# Altium PCB PCB.PcbDoc
Units mil, origin at the board's own origin, x right, y up, seen from the top; angles counter-clockwise.
Board outline 1965 x 1965 mil, 2 copper layers (Top Layer, Bottom Layer); 8 components, 3 nets, 22 pads, 454 vias.
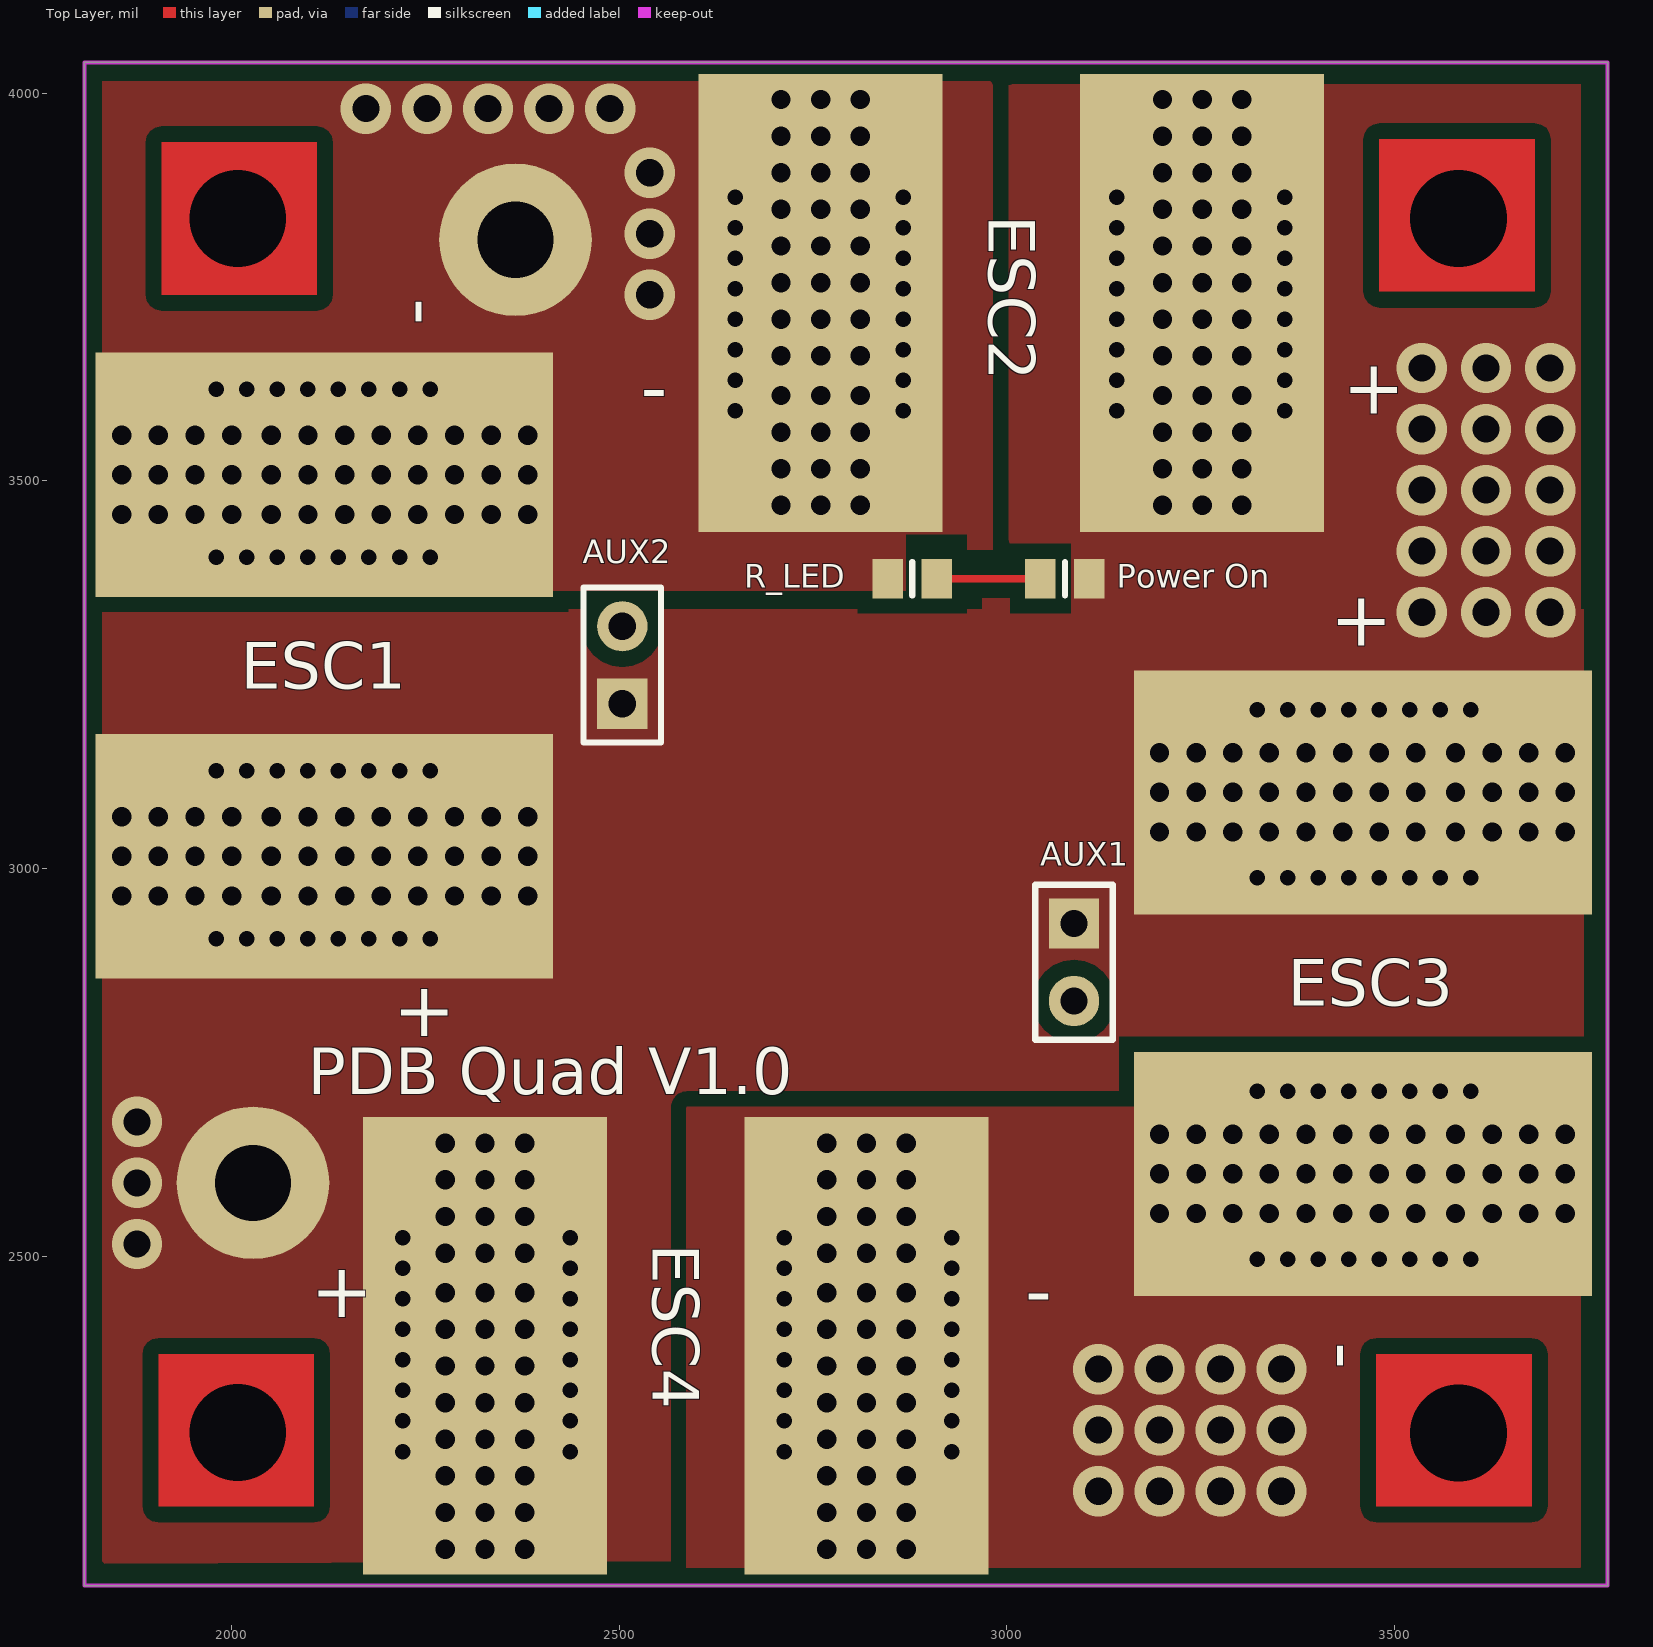
[diagram p0: Top Layer view]
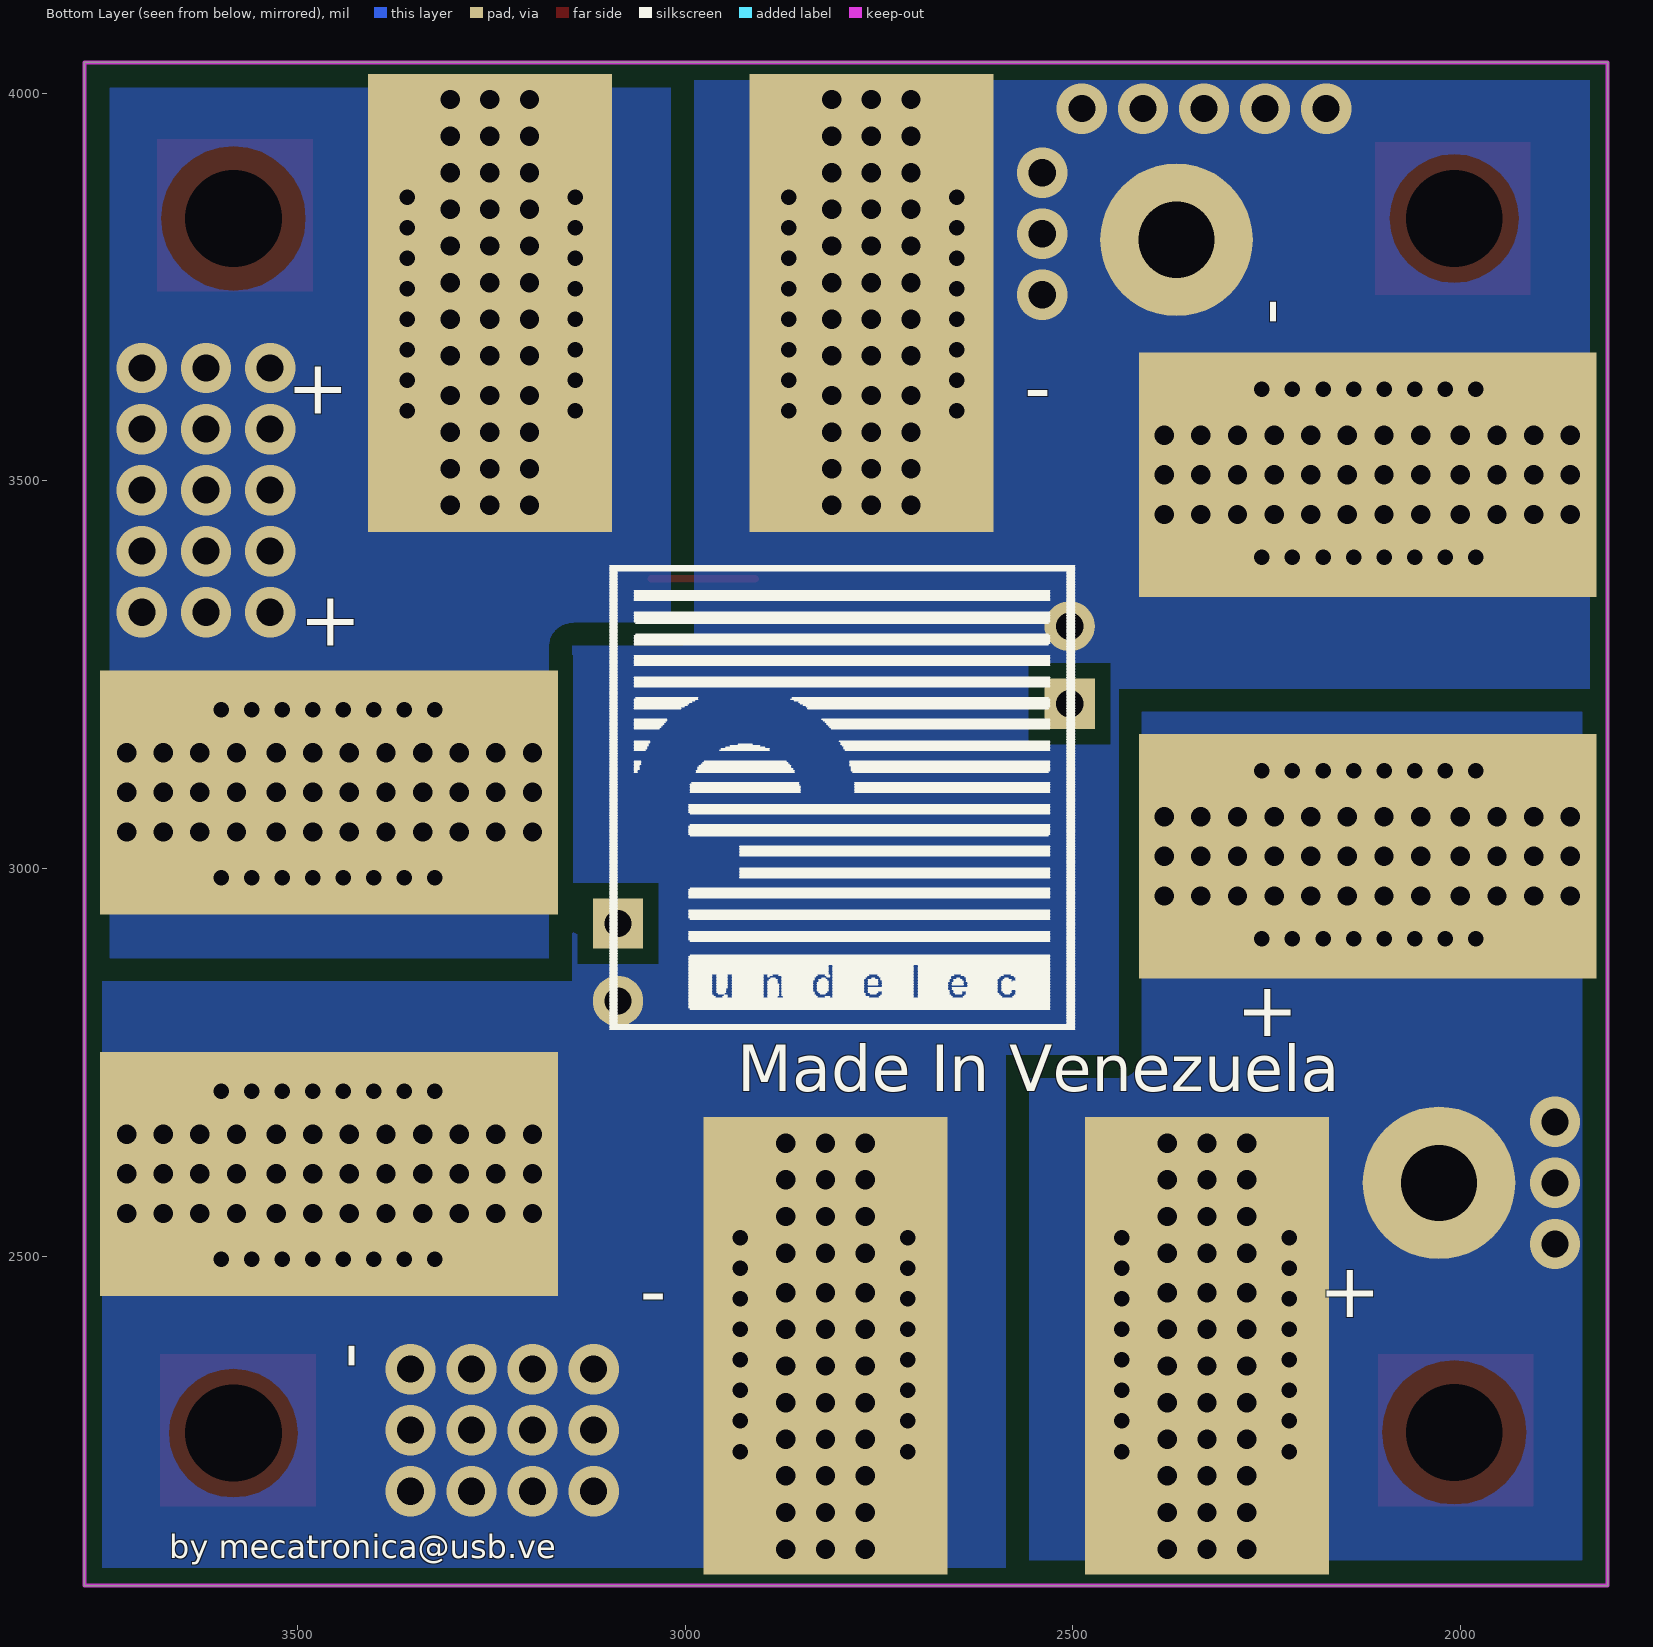
[diagram p1: Bottom Layer view, seen from below]

## Layer stack, top to bottom
Top Solder: solder mask 0.4, Solder Resist, Dk 3.5
Top Layer: signal copper 1.4
Dielectric 1: dielectric 12.6, FR-4, Dk 4.8
Bottom Layer: signal copper 1.4
Bottom Solder: solder mask 0.4, Solder Resist, Dk 3.5

## Board outline
1810,4040 3775,4040 3775,2075 1810,2075

## Design rules (kind name [scope] priority, off if disabled: settings)
Clearance [All] p1: gap=20
PlaneConnect [All] p1: planeconnectstyle=Direct reliefexpansion=20 reliefentries=4 reliefconductorwidth=10 reliefairgap=10
PolygonConnect [All] p1: connectstyle=Direct reliefconductorwidth=10 reliefentries=4 polygonreliefangle="90 Angle" airgapwidth=10
RoutingVias [All] p1: holewidth=28 width=50 viastyle="Through Hole" minholewidth=15 minwidth=15 maxholewidth=30 maxwidth=50
SolderMaskExpansion [All] p1: expansion=10
Width [All] p1: maxlimit=10 minlimit=10 preferedwidth=10
29 further rules are at their usual default settings.

## Classes and differential pairs
component class "PCB Schematic": AUX1 AUX2 "Power On" R_LED

## Components (designator, comment, footprint, x,y, rotation, side; value= is the part's Value field where it differs from the comment)
AUX1 "Header 2" HDR1X2 3086.61,2929.13 r270 top
AUX2 "Header 2" HDR1X2 2503.94,3212.6 r90 top
ESC1 "Header 2" "Banana 3.5mm PowerPad" 2224.41,2940.94 r90 top
ESC2 "Header 2" "Banana 3.5mm PowerPad" 3326.77,3834.65 r180 top
ESC3 "Header 2" "Banana 3.5mm PowerPad" 3354.33,3173.23 r270 top
ESC4 "Header 2" "Banana 3.5mm PowerPad" 2251.97,2279.53 r0 top
"Power On" "LED" 6-0805_L 3074.8,3374.02 r180 top (schematic designator LED_Batt)
R_LED "Res" 6-0805_L 2877.95,3374.02 r0 top

## Footprints (in the part's own frame and the unit in brackets; to place one, negate y for a bottom-side part, rotate by r counter-clockwise, add the part's x,y. Pads: shape width x height; smd on the part's side, far side on the other; paste and mask are expansions set on the pad)
6-0805_L [mm] "Chip Resistor, Body 2.0x1.2mm, IPC High Density"
  rect 1x1.3 smd: 1(-0.8,0) 2(0.8,0)
  silkscreen extent 0,-0.55 0,0.55, body extent -1.07,-0.7 1.07,0.7, height 0.7
"Banana 3.5mm PowerPad" [mm]
  rect 8x15 all layers, no hole: 1(1.905,2.667) 2(14.405,2.667)
HDR1X2 [mil] "Connector; Header; 2 Position"
  rect 65x65 hole 35: 1(0,0)
  round 65 hole 35: 2(100,0)
  silkscreen extent -50,-50 150,50

## Part data
AUX1 AUX2 ESC1 ESC2 ESC3 ESC4: "Header, 2-Pin"
"Power On": library part LED2, "Typical RED, GREEN, YELLOW, AMBER GaAs LED"
R_LED: library part Res3, "Resistor"

## Free pads (board coordinates)
  round 78.74 hole 125: 0(2007.87,2272.64) 0(2007.87,3838.58) 0(3582.68,2271.65) 0(3582.68,3838.58)
  round 196.85 hole 98.43: 0(2027.56,2594.49) 0(2366.14,3811.02)

## Via types
v1: diameter 25, hole 25, Top Layer to Bottom Layer, 288 vias
v2: diameter 20, hole 20, Top Layer to Bottom Layer, 128 vias
v3: diameter 65, hole 35, Top Layer to Bottom Layer, 38 vias

## Nets (pads, with @x,y where several pads share a name; then routed paths per layer and width w, separated by ;. In a path a pad name is that pad's centre, name@x,y a point inside that pad or via, vN(x,y) a via of type N, cw(c..) or ccw(c..) an arc to the next point about the centre after c; other vN are vias at no path point)
GND: AUX1.2 AUX2.2 ESC1.2 ESC2.2 ESC3.2 ESC4.2 pad.0@2366.14,3811.02 R_LED.1
  other v1: 2767.72,2122.05 2818.9,2122.05 2870.08,2122.05 2767.72,2169.29 2818.9,2169.29 2870.08,2169.29 2767.72,2216.54 2818.9,2216.54 2870.08,2216.54 2767.72,2263.78 2818.9,2263.78 2870.08,2263.78 2767.72,2311.02 2818.9,2311.02 2870.08,2311.02 2767.72,2358.27 2818.9,2358.27 2870.08,2358.27 2767.72,2405.51 2818.9,2405.51 2870.08,2405.51 2767.72,2452.76 2818.9,2452.76 2870.08,2452.76 2767.72,2503.94 2818.9,2503.94 2870.08,2503.94 2767.72,2551.18 2818.9,2551.18 2870.08,2551.18 3196.85,2555.12 3244.09,2555.12 3291.34,2555.12 3338.58,2555.12 3385.83,2555.12 3433.07,2555.12 3480.32,2555.12 3527.56,2555.12 3578.74,2555.12 3625.98,2555.12 3673.23,2555.12 3720.47,2555.12 2767.72,2598.43 2818.9,2598.43 2870.08,2598.43 3196.85,2606.3 3244.09,2606.3 3291.34,2606.3 3338.58,2606.3 3385.83,2606.3 3433.07,2606.3 3480.32,2606.3 3527.56,2606.3 3578.74,2606.3 3625.98,2606.3 3673.23,2606.3 3720.47,2606.3 2767.72,2645.67 2818.9,2645.67 2870.08,2645.67 3196.85,2657.48 3244.09,2657.48 3291.34,2657.48 3338.58,2657.48 3385.83,2657.48 3433.07,2657.48 3480.32,2657.48 3527.56,2657.48 3578.74,2657.48 3625.98,2657.48 3673.23,2657.48 3720.47,2657.48 1858.27,3456.69 1905.51,3456.69 1952.76,3456.69 2000,3456.69 2051.18,3456.69 2098.43,3456.69 2145.67,3456.69 2192.91,3456.69 2240.16,3456.69 2287.4,3456.69 2334.65,3456.69 2381.89,3456.69 2708.66,3468.5 2759.84,3468.5 2811.02,3468.5 1858.27,3507.87 1905.51,3507.87 1952.76,3507.87 2000,3507.87 2051.18,3507.87 2098.43,3507.87 2145.67,3507.87 2192.91,3507.87 2240.16,3507.87 2287.4,3507.87 2334.65,3507.87 2381.89,3507.87 2708.66,3515.75 2759.84,3515.75 2811.02,3515.75 1858.27,3559.06 1905.51,3559.06 1952.76,3559.06 2000,3559.06 2051.18,3559.06 2098.43,3559.06 2145.67,3559.06 2192.91,3559.06 2240.16,3559.06 2287.4,3559.06 2334.65,3559.06 2381.89,3559.06 2708.66,3562.99 2759.84,3562.99 2811.02,3562.99 2708.66,3610.24 2759.84,3610.24 2811.02,3610.24 2708.66,3661.42 2759.84,3661.42 2811.02,3661.42 2708.66,3708.66 2759.84,3708.66 2811.02,3708.66 2708.66,3755.91 2759.84,3755.91 2811.02,3755.91 2708.66,3803.15 2759.84,3803.15 2811.02,3803.15 2708.66,3850.39 2759.84,3850.39 2811.02,3850.39 2708.66,3897.64 2759.84,3897.64 2811.02,3897.64 2708.66,3944.88 2759.84,3944.88 2811.02,3944.88 2708.66,3992.13 2759.84,3992.13 2811.02,3992.13
  other v2: 2712.6,2248.03 2929.13,2248.03 2712.6,2287.4 2929.13,2287.4 2712.6,2326.77 2929.13,2326.77 2712.6,2366.14 2929.13,2366.14 2712.6,2405.51 2929.13,2405.51 2712.6,2444.88 2929.13,2444.88 2712.6,2484.25 2929.13,2484.25 3322.83,2496.06 3362.2,2496.06 3401.57,2496.06 3440.95,2496.06 3480.32,2496.06 3519.69,2496.06 3559.06,2496.06 3598.43,2496.06 2712.6,2523.62 2929.13,2523.62 3322.83,2712.6 3362.2,2712.6 3401.57,2712.6 3440.95,2712.6 3480.32,2712.6 3519.69,2712.6 3559.06,2712.6 3598.43,2712.6 1980.31,3401.57 2019.68,3401.57 2059.06,3401.57 2098.43,3401.57 2137.8,3401.57 2177.17,3401.57 2216.54,3401.57 2255.91,3401.57 2649.61,3590.55 2866.14,3590.55 1980.31,3618.11 2019.68,3618.11 2059.06,3618.11 2098.43,3618.11 2137.8,3618.11 2177.17,3618.11 2216.54,3618.11 2255.91,3618.11 2649.61,3629.92 2866.14,3629.92 2649.61,3669.29 2866.14,3669.29 2649.61,3708.66 2866.14,3708.66 2649.61,3748.03 2866.14,3748.03 2649.61,3787.4 2866.14,3787.4 2649.61,3826.77 2866.14,3826.77 2649.61,3866.14 2866.14,3866.14
  other v3: 3118.11,2196.85 3196.85,2196.85 3275.59,2196.85 3354.33,2196.85 3118.11,2275.59 3196.85,2275.59 3275.59,2275.59 3354.33,2275.59 3118.11,2354.33 3196.85,2354.33 3275.59,2354.33 3354.33,2354.33 2539.37,3740.16 2539.37,3818.9 2539.37,3897.64 2173.23,3980.31 2251.97,3980.31 2330.71,3980.31 2409.45,3980.31 2488.19,3980.31
NetLED_Batt_2: "Power On.2" R_LED.2 | length 133.9
  Top Layer w10: R_LED.2 3043.31,3374.02
VBATT: "Power On.1" AUX1.1 AUX2.1 ESC1.1 ESC2.1 ESC3.1 ESC4.1 pad.0@2027.56,2594.49
  other v1: 2275.59,2122.05 2326.77,2122.05 2377.95,2122.05 2275.59,2169.29 2326.77,2169.29 2377.95,2169.29 2275.59,2216.54 2326.77,2216.54 2377.95,2216.54 2275.59,2263.78 2326.77,2263.78 2377.95,2263.78 2275.59,2311.02 2326.77,2311.02 2377.95,2311.02 2275.59,2358.27 2326.77,2358.27 2377.95,2358.27 2275.59,2405.51 2326.77,2405.51 2377.95,2405.51 2275.59,2452.76 2326.77,2452.76 2377.95,2452.76 2275.59,2503.94 2326.77,2503.94 2377.95,2503.94 2275.59,2551.18 2326.77,2551.18 2377.95,2551.18 2275.59,2598.43 2326.77,2598.43 2377.95,2598.43 2275.59,2645.67 2326.77,2645.67 2377.95,2645.67 1858.27,2964.57 1905.51,2964.57 1952.76,2964.57 2000,2964.57 2051.18,2964.57 2098.43,2964.57 2145.67,2964.57 2192.91,2964.57 2240.16,2964.57 2287.4,2964.57 2334.65,2964.57 2381.89,2964.57 1858.27,3015.75 1905.51,3015.75 1952.76,3015.75 2000,3015.75 2051.18,3015.75 2098.43,3015.75 2145.67,3015.75 2192.91,3015.75 2240.16,3015.75 2287.4,3015.75 2334.65,3015.75 2381.89,3015.75 3196.85,3047.24 3244.09,3047.24 3291.34,3047.24 3338.58,3047.24 3385.83,3047.24 3433.07,3047.24 3480.32,3047.24 3527.56,3047.24 3578.74,3047.24 3625.98,3047.24 3673.23,3047.24 3720.47,3047.24 1858.27,3066.93 1905.51,3066.93 1952.76,3066.93 2000,3066.93 2051.18,3066.93 2098.43,3066.93 2145.67,3066.93 2192.91,3066.93 2240.16,3066.93 2287.4,3066.93 2334.65,3066.93 2381.89,3066.93 3196.85,3098.43 3244.09,3098.43 3291.34,3098.43 3338.58,3098.43 3385.83,3098.43 3433.07,3098.43 3480.32,3098.43 3527.56,3098.43 3578.74,3098.43 3625.98,3098.43 3673.23,3098.43 3720.47,3098.43 3196.85,3149.61 3244.09,3149.61 3291.34,3149.61 3338.58,3149.61 3385.83,3149.61 3433.07,3149.61 3480.32,3149.61 3527.56,3149.61 3578.74,3149.61 3625.98,3149.61 3673.23,3149.61 3720.47,3149.61 3200.79,3468.5 3251.97,3468.5 3303.15,3468.5 3200.79,3515.75 3251.97,3515.75 3303.15,3515.75 3200.79,3562.99 3251.97,3562.99 3303.15,3562.99 3200.79,3610.24 3251.97,3610.24 3303.15,3610.24 3200.79,3661.42 3251.97,3661.42 3303.15,3661.42 3200.79,3708.66 3251.97,3708.66 3303.15,3708.66 3200.79,3755.91 3251.97,3755.91 3303.15,3755.91 3200.79,3803.15 3251.97,3803.15 3303.15,3803.15 3200.79,3850.39 3251.97,3850.39 3303.15,3850.39 3200.79,3897.64 3251.97,3897.64 3303.15,3897.64 3200.79,3944.88 3251.97,3944.88 3303.15,3944.88 3200.79,3992.13 3251.97,3992.13 3303.15,3992.13
  other v2: 2220.47,2248.03 2437.01,2248.03 2220.47,2287.4 2437.01,2287.4 2220.47,2326.77 2437.01,2326.77 2220.47,2366.14 2437.01,2366.14 2220.47,2405.51 2437.01,2405.51 2220.47,2444.88 2437.01,2444.88 2220.47,2484.25 2437.01,2484.25 2220.47,2523.62 2437.01,2523.62 1980.31,2909.45 2019.68,2909.45 2059.06,2909.45 2098.43,2909.45 2137.8,2909.45 2177.17,2909.45 2216.54,2909.45 2255.91,2909.45 3322.83,2988.19 3362.2,2988.19 3401.57,2988.19 3440.95,2988.19 3480.32,2988.19 3519.69,2988.19 3559.06,2988.19 3598.43,2988.19 1980.31,3125.98 2019.68,3125.98 2059.06,3125.98 2098.43,3125.98 2137.8,3125.98 2177.17,3125.98 2216.54,3125.98 2255.91,3125.98 3322.83,3204.72 3362.2,3204.72 3401.57,3204.72 3440.95,3204.72 3480.32,3204.72 3519.69,3204.72 3559.06,3204.72 3598.43,3204.72 3141.73,3590.55 3358.27,3590.55 3141.73,3629.92 3358.27,3629.92 3141.73,3669.29 3358.27,3669.29 3141.73,3708.66 3358.27,3708.66 3141.73,3748.03 3358.27,3748.03 3141.73,3787.4 3358.27,3787.4 3141.73,3826.77 3358.27,3826.77 3141.73,3866.14 3358.27,3866.14
  other v3: 1877.95,2515.75 1877.95,2594.49 1877.95,2673.23 3535.43,3330.71 3618.11,3330.71 3700.79,3330.71 3535.43,3409.45 3618.11,3409.45 3700.79,3409.45 3535.43,3488.19 3618.11,3488.19 3700.79,3488.19 3535.43,3566.93 3618.11,3566.93 3700.79,3566.93 3535.43,3645.67 3618.11,3645.67 3700.79,3645.67

## Polygon pours and split planes (outlines as drawn)
VBATT on Top Layer "VBatt" (solid, remove dead copper, pour order 11): 2968.5,4011.81 2968.5,3283.46 3740.16,3283.46 3740.16,4011.81
GND on Top Layer "VBatt" (solid, remove dead copper, pour order 7): 3740.16,2692.91 3740.16,2098.43 3763.78,2074.8 2586.61,2074.8 2586.61,2692.91
VBATT on Top Layer "VBatt" (solid, remove dead copper, pour order 5): 1811.02,2102.98 1811.02,3334.65 3744.09,3334.65 3744.09,2677.17 2578.74,2677.17 2578.74,2106.72
GND on Top Layer "VBatt" (solid, remove dead copper, pour order 2): 1830.42,4015.75 2992.13,4015.75 2992.13,3358.27 1831.29,3358.27
VBATT on Bottom Layer "VBatt" (solid, remove dead copper, pour order 15): 1810,2078.74 1810,3254.88 1811.02,3255.91 2598.43,3255.91 2598.43,2078.74
VBATT on Bottom Layer "VBatt" (solid, remove dead copper, pour order 13): 2988.19,4027.26 2988.19,3279.53 3141.73,3279.53 3141.73,2846.46 3771.65,2846.46 3771.65,4027.56
GND on Bottom Layer "VBatt" (solid, remove dead copper, pour order 9): 3775,2078.74 3775.59,2079.33 3775.59,2854.33 3145.67,2854.33 3145.67,3287.4 3003.94,3287.4 2988.19,3303.15 2988.19,4039.37 1811.02,4039.37 1811.02,3232.28 2440.94,3232.28 2440.94,2759.84 2586.61,2759.84 2586.61,2086.61

## Keep-outs
Keep-Out Layer:
  the board outline again, w5

## Other copper
Top Layer:
  rectangle: 3480.32,3744.09 3681.1,3940.94
  rectangle: 1909.45,3740.16 2110.24,3937.01
  rectangle: 1905.51,2177.17 2106.3,2374.02
  rectangle: 3476.38,2177.17 3677.17,2374.02

## Silkscreen, mask and mechanical layers (free items; w line width, h text height)
Top Overlay:
  text "-" at 2267.72,3700.79 h70 r90
  text "-" at 2527.56,3586.61 h70
  text "+" at 3433.07,3586.61 h70
  text "+" at 3417.32,3287.4 h70
  text "+" at 2208.66,2783.46 h70
  text "PDB Quad V1.0" at 2098.43,2708.66 h60
  text "+" at 2102.36,2421.26 h70
  text "-" at 3023.62,2421.26 h70
  text "-" at 3456.69,2354.33 h70 r90
Bottom Overlay:
  drawing of 983 lines, arcs and shapes, not listed
  text "-" at 2267.72,3700.79 h70 r90
  text "-" at 2527.56,3586.61 h70
  text "+" at 3433.07,3586.61 h70
  text "+" at 3417.32,3287.4 h70
  text "+" at 2208.66,2783.46 h70
  text "Made In Venezuela" at 2933.07,2712.6 h60
  text "+" at 2102.36,2421.26 h70
  text "-" at 3023.62,2421.26 h70
  text "-" at 3456.69,2354.33 h70 r90
  text "by mecatronica@usb.ve" at 3665.35,2110.24 h30